# Altium PCB -RasPi-BplusHAT.PcbDoc
Units mm, origin at the board's own origin, x right, y up, seen from the top; angles counter-clockwise.
Board outline 65.02 x 56.01 mm, 2 copper layers (Top, Bottom), stack 1.57 mm thick; 52 components, 51 nets, 172 pads, 0 vias.
Unrouted connection lines stored in the file: 99.
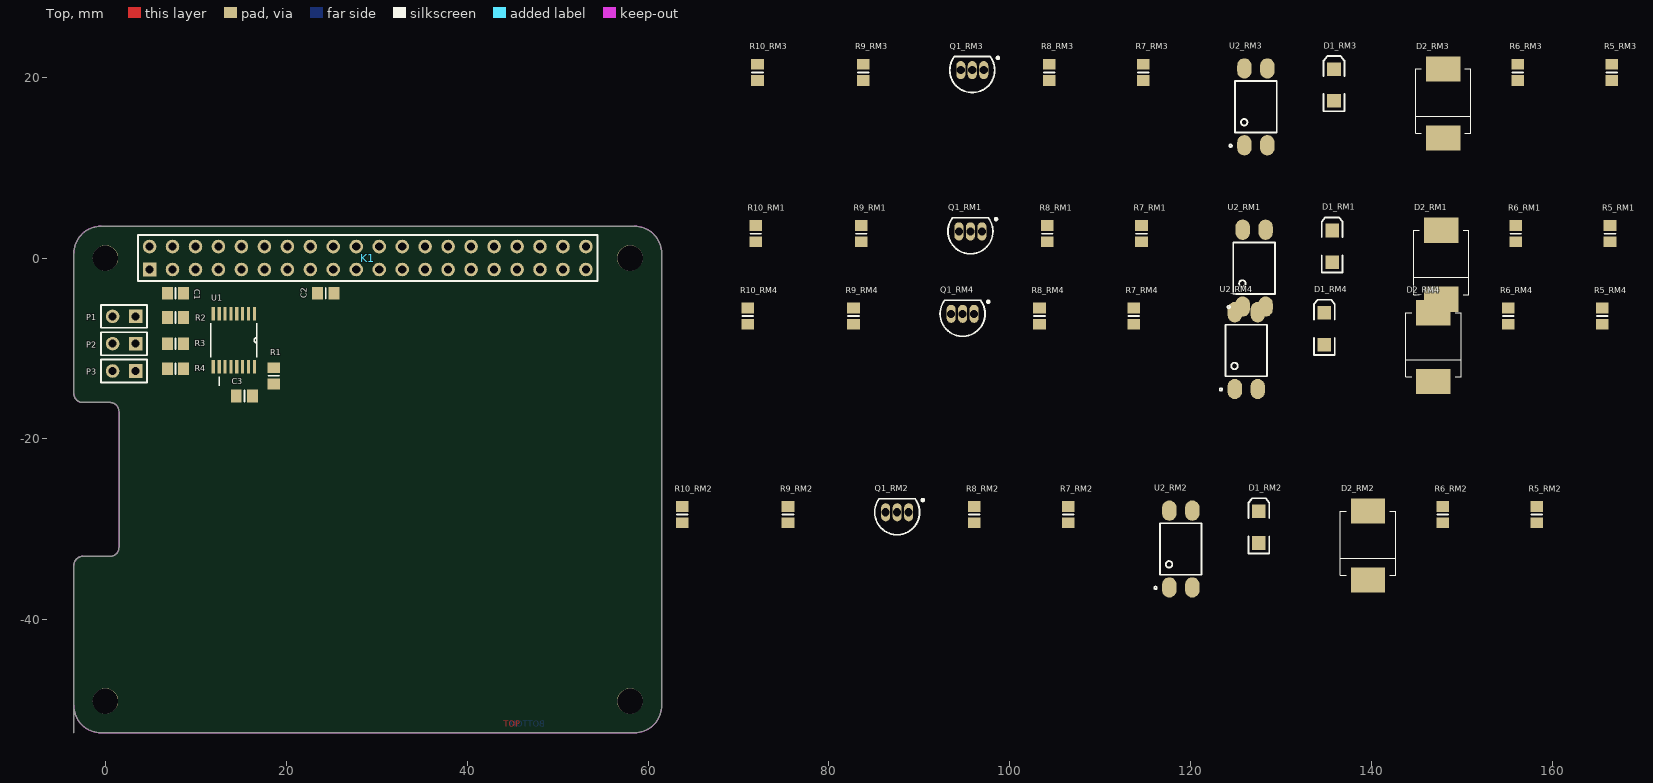
[diagram p0: Top view]
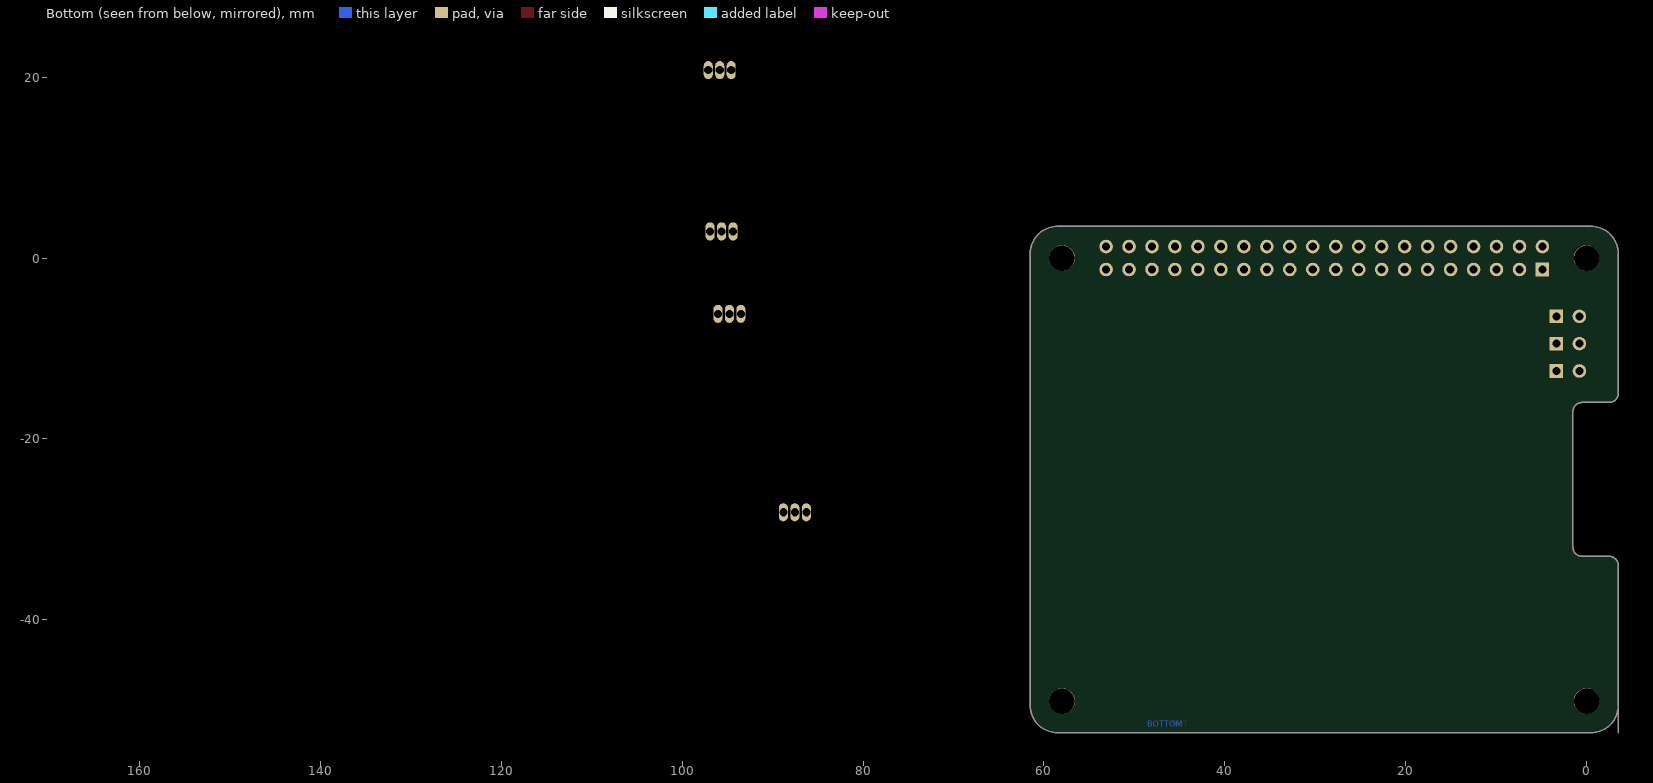
[diagram p1: Bottom view, seen from below]

## Layer stack, top to bottom
Top Solder: solder mask 0.0102, Solder Resist, Dk 3.5
Top: signal copper 0.035
Dielectric 1: core 1.5, FR-4, Dk 4.8
Bottom: signal copper 0.035
Bottom Solder: solder mask 0.0102, Solder Resist, Dk 3.5

## Board outline
-3.505,-49.479 ccw(c-0.483,-49.479) -0.483,-52.502 58.496,-52.502 ccw(c58.496,-49.479) 61.519,-49.479 61.519,0.508 ccw(c58.509,0.495) 58.496,3.505 -0.483,3.505 ccw(c-0.495,0.495) -3.505,0.508 -3.505,-14.986 ccw(c-2.502,-14.973) -2.489,-15.977 0.508,-15.977 cw(c0.495,-16.98) 1.499,-16.993 1.499,-31.979 cw(c0.495,-31.991) 0.508,-32.995 -2.489,-32.995 ccw(c-2.502,-33.998) -3.505,-33.985 -3.505,-52.502

## Design rules (kind name [scope] priority, off if disabled: settings)
Clearance mdViaVia [IsVia vs IsVia] p1: gap=0.152
Clearance mdPadVia [IsPad vs IsVia] p2: gap=0.152
Clearance mdPadPad [IsPad vs IsPad] p3: gap=0.152
Clearance mdWireVia [(InLayerClass('Signal Layers') AND IsTrack) vs IsVia] p4: gap=0.152
Clearance mdWirePad [(InLayerClass('Signal Layers') AND IsTrack) vs IsPad] p5: gap=0.152
Clearance mdWireWire [(InLayerClass('Signal Layers') AND IsTrack) vs (InLayerClass('Signal Layers') AND IsTrack)] p6: gap=0.152
Clearance [All] p7: gap=0.152
HoleSize [All] p1: absolutevalues=TRUE maxlimit=2540 minlimit=0.305 maxpercent=80.000 minpercent=20.000
HoleToHoleClearance [All] p1: gap=0.203 allowstackedmicrovias=TRUE
PolygonConnect ThermalVias [IsVia] p1: connectstyle=Direct reliefconductorwidth=0.254 reliefentries=4 polygonreliefangle="90 Angle" airgapwidth=0.254
PolygonConnect [All] p2: connectstyle=Relief reliefconductorwidth=0.254 reliefentries=4 polygonreliefangle="90 Angle" airgapwidth=0.254
RoomDefinition RasPi-BplusHAT [InComponentClass('RasPi-BplusHAT')] p1: confinementstyle=ConfineIn formatcopy=TRUE lockcomponents=FALSE outline -3.505,-52.603 61.57,-52.603 61.57,3.658 -3.505,3.658
RoomDefinition RM4 [InComponentClass('RM4')] p2: confinementstyle=ConfineIn formatcopy=TRUE lockcomponents=FALSE outline 69.901,-16.078 173.914,-16.078 173.914,-1.6 69.901,-1.6
RoomDefinition RM3 [InComponentClass('RM3')] p3: confinementstyle=ConfineIn formatcopy=TRUE lockcomponents=FALSE outline 70.968,10.871 174.981,10.871 174.981,25.349 70.968,25.349
RoomDefinition RM2 [InComponentClass('RM2')] p4: confinementstyle=ConfineIn formatcopy=TRUE lockcomponents=FALSE outline 62.662,-38.024 166.675,-38.024 166.675,-23.546 62.662,-23.546
RoomDefinition RM1 [InComponentClass('RM1')] p5: confinementstyle=ConfineIn formatcopy=TRUE lockcomponents=FALSE outline 70.764,-6.96 174.777,-6.96 174.777,7.518 70.764,7.518
RoutingVias [All] p1: holewidth=0.711 width=1.27 viastyle="Through Hole" minholewidth=0.711 minwidth=1.27 maxholewidth=0.711 maxwidth=1.27
SilkToSilkClearance [All] p1 off: silktosilkclearance=0.254
SilkToSolderMaskClearance [IsPad] p1 off: minsilkscreentomaskgap=0.254 clearancetoexposedcopper=TRUE
SolderMaskExpansion [All] p1: expansion=0.051
Width [All] p1: maxlimit=2540 minlimit=0.152 preferedwidth=0.254
26 further rules are at their usual default settings.

## Classes and differential pairs
channel class RelayPowerStage: RM1 RM2 RM3 RM4
component class RM4: D1_RM4 D2_RM4 J2_RM4 K2_RM4 Q1_RM4 R5_RM4 R6_RM4 R7_RM4 R8_RM4 R9_RM4 R10_RM4 U2_RM4
component class RM3: D1_RM3 D2_RM3 J2_RM3 K2_RM3 Q1_RM3 R5_RM3 R6_RM3 R7_RM3 R8_RM3 R9_RM3 R10_RM3 U2_RM3
component class RM2: D1_RM2 D2_RM2 J2_RM2 K2_RM2 Q1_RM2 R5_RM2 R6_RM2 R7_RM2 R8_RM2 R9_RM2 R10_RM2 U2_RM2
component class RM1: D1_RM1 D2_RM1 J2_RM1 K2_RM1 Q1_RM1 R5_RM1 R6_RM1 R7_RM1 R8_RM1 R9_RM1 R10_RM1 U2_RM1
component class RasPi-BplusHAT: C1 C2 C3 J1 K1 P1 P2 P3 R1 R2 R3 R4 U1

## Components (designator, comment, footprint, x,y, rotation, side; value= is the part's Value field where it differs from the comment)
C1 "Cap" 6-0805_N 7.747,-3.912 r0 top
C2 "Cap" 6-0805_N 24.359,-3.912 r0 top
C3 "Cap" 6-0805_N 15.367,-15.265 r0 top
D1_RM1 "LED2" 3.2X1.6X1.1 135.661,1.295 r90 top (schematic designator D1)
D1_RM2 "LED2" 3.2X1.6X1.1 127.559,-29.769 r90 top (schematic designator D1)
D1_RM3 "LED2" 3.2X1.6X1.1 135.865,19.126 r90 top (schematic designator D1)
D1_RM4 "LED2" 3.2X1.6X1.1 134.798,-7.823 r90 top (schematic designator D1)
D2_RM1 "S1BB-13-F" DIODE_SMC 147.726,-0.737 r90 top (schematic designator D2)
D2_RM2 "S1BB-13-F" DIODE_SMC 139.624,-31.801 r90 top (schematic designator D2)
D2_RM3 "S1BB-13-F" DIODE_SMC 147.93,17.094 r90 top (schematic designator D2)
D2_RM4 "S1BB-13-F" DIODE_SMC 146.863,-9.855 r90 top (schematic designator D2)
K1 "PIN20X2" HDR2X20 4.877,-1.27 r0 top
P1 "Header 2" HDR1X2 3.327,-6.452 r180 top
P2 "Header 2" HDR1X2 3.327,-9.474 r180 top
P3 "Header 2" HDR1X2 3.327,-12.497 r180 top
Q1_RM1 "P2N2222AG" TO-92A 95.656,2.946 r90 top (schematic designator Q1)
Q1_RM2 "P2N2222AG" TO-92A 87.554,-28.118 r90 top (schematic designator Q1)
Q1_RM3 "P2N2222AG" TO-92A 95.86,20.777 r90 top (schematic designator Q1)
Q1_RM4 "P2N2222AG" TO-92A 94.793,-6.172 r90 top (schematic designator Q1)
R1 "Res1" 6-0805_N 18.618,-13.03 r270 top
R2 "Res1" 6-0805_N 7.747,-6.579 r0 top
R3 "Res1" 6-0805_N 7.747,-9.474 r0 top
R4 "Res1" 6-0805_N 7.747,-12.243 r0 top
R5_RM1 "Res1" 6-0805_N 166.395,2.692 r90 top (schematic designator R5)
R5_RM2 "Res1" 6-0805_N 158.293,-28.372 r90 top (schematic designator R5)
R5_RM3 "Res1" 6-0805_N 166.599,20.523 r90 top (schematic designator R5)
R5_RM4 "Res1" 6-0805_N 165.532,-6.426 r90 top (schematic designator R5)
R6_RM1 "Res1" 6-0805_N 155.981,2.692 r90 top (schematic designator R6)
R6_RM2 "Res1" 6-0805_N 147.879,-28.372 r90 top (schematic designator R6)
R6_RM3 "Res1" 6-0805_N 156.185,20.523 r90 top (schematic designator R6)
R6_RM4 "Res1" 6-0805_N 155.118,-6.426 r90 top (schematic designator R6)
R7_RM1 "Res1" 6-0805_N 114.579,2.692 r90 top (schematic designator R7)
R7_RM2 "Res1" 6-0805_N 106.477,-28.372 r90 top (schematic designator R7)
R7_RM3 "Res1" 6-0805_N 114.783,20.523 r90 top (schematic designator R7)
R7_RM4 "Res1" 6-0805_N 113.716,-6.426 r90 top (schematic designator R7)
R8_RM1 "Res1" 6-0805_N 104.165,2.692 r90 top (schematic designator R8)
R8_RM2 "Res1" 6-0805_N 96.063,-28.372 r90 top (schematic designator R8)
R8_RM3 "Res1" 6-0805_N 104.369,20.523 r90 top (schematic designator R8)
R8_RM4 "Res1" 6-0805_N 103.302,-6.426 r90 top (schematic designator R8)
R9_RM1 "Res1" 6-0805_N 83.591,2.692 r90 top (schematic designator R9)
R9_RM2 "Res1" 6-0805_N 75.489,-28.372 r90 top (schematic designator R9)
R9_RM3 "Res1" 6-0805_N 83.795,20.523 r90 top (schematic designator R9)
R9_RM4 "Res1" 6-0805_N 82.728,-6.426 r90 top (schematic designator R9)
R10_RM1 "Res1" 6-0805_N 71.907,2.692 r90 top (schematic designator R10)
R10_RM2 "Res1" 6-0805_N 63.805,-28.372 r90 top (schematic designator R10)
R10_RM3 "Res1" 6-0805_N 72.111,20.523 r90 top (schematic designator R10)
R10_RM4 "Res1" 6-0805_N 71.044,-6.426 r90 top (schematic designator R10)
U1 "PCA9557PW,112" SOP65P640X110-16N 14.199,-9.093 r270 top
U2_RM1 "PC817X2NIP0F" SOT254P975X400-4N 127.025,-1.118 r90 top (schematic designator U2)
U2_RM2 "PC817X2NIP0F" SOT254P975X400-4N 118.923,-32.182 r90 top (schematic designator U2)
U2_RM3 "PC817X2NIP0F" SOT254P975X400-4N 127.229,16.713 r90 top (schematic designator U2)
U2_RM4 "PC817X2NIP0F" SOT254P975X400-4N 126.162,-10.236 r90 top (schematic designator U2)

## Footprints (in the part's own frame and the unit in brackets; to place one, negate y for a bottom-side part, rotate by r counter-clockwise, add the part's x,y. Pads: shape width x height; smd on the part's side, far side on the other; paste and mask are expansions set on the pad)
3.2X1.6X1.1 [mm] "SMT LED; 2 Flat Leads"
  rect 1.5x1.5 smd: 1(-1.75,0) 2(1.75,0)
  silkscreen extent -2.9,-1.15 3.2,1.15
6-0805_N [mm] "Chip Resistor, Body 2.0x1.2mm, IPC Medium Density"
  rect 1.2x1.4 smd: 1(-0.9,0) 2(0.9,0)
  silkscreen extent 0,-0.6 0,0.6, body extent -1.07,-0.7 1.07,0.7, height 0.7
DIODE_SMC [mil] "Diode; 2 Leads"
  rect 110x150 smd: 1(-150,0) 2(150,0)
  silkscreen extent -130,-120 150,120
HDR1X2 [mm] "Connector; Header; 2 Position"
  rect 1.5x1.5 hole 0.9: 1(0,0)
  round 1.5 hole 0.9: 2(2.54,0)
  silkscreen extent -1.27,-1.27 3.81,1.27
HDR2X20 [mm] "Connector; Header; 20x2 Position"
  rect 1.5x1.5 hole 0.9: 1(0,0)
  round 1.5 hole 0.9: 2(0,2.54) 3(2.54,0) 4(2.54,2.54) 5(5.08,0) 6(5.08,2.54) 7(7.62,0) 8(7.62,2.54) 9(10.16,0) 10(10.16,2.54) 11(12.7,0) 12(12.7,2.54) 13(15.24,0) 14(15.24,2.54) 15(17.78,0) 16(17.78,2.54) 17(20.32,0) 18(20.32,2.54) 19(22.86,0) 20(22.86,2.54) 21(25.4,0) 22(25.4,2.54) 23(27.94,0) 24(27.94,2.54) 25(30.48,0) 26(30.48,2.54) 27(33.02,0) 28(33.02,2.54) 29(35.56,0) 30(35.56,2.54) 31(38.1,0) 32(38.1,2.54) 33(40.64,0) 34(40.64,2.54) 35(43.18,0) 36(43.18,2.54) 37(45.72,0) 38(45.72,2.54) 39(48.26,0) 40(48.26,2.54)
  silkscreen extent -1.27,-1.27 49.53,3.81
SOP65P640X110-16N [mil]
  rect 58x14 smd paste-1000 mask-1000: 1(-115,90) 2(-115,64) 3(-115,38) 4(-115,13) 5(-115,-13) 6(-115,-38) 7(-115,-64) 8(-115,-90) 9(115,-90) 10(115,-64) 11(115,-38) 12(115,-13) 13(115,13) 14(115,38) 15(115,64) 16(115,90)
  silkscreen extent -74,-100 198,100
SOT254P975X400-4N [mm]
  oval 2.25x1.6 smd paste-25.4: 1(-4.25,1.27) 2(-4.25,-1.27) 3(4.25,-1.27) 4(4.25,1.27)
  silkscreen extent -4.44,-2.3 2.85,2.94
TO-92A [mm] "TO, Flat Index; 3 In-Line, Axial Leads; Body Dia. 4.5mm; Leads 0.51 x 0.48 mm (max)"
  oval 2x1 hole 0.9: 1(0,-1.27) 2(0,0) 3(0,1.27)
  silkscreen extent -2.48,-2.96 1.5,2.48, body extent -2.5,-2.5 1.5,2.5, height 6.86

## Part data
C1 C2 C3: "Capacitor"
D1_RM1 D1_RM2 D1_RM3 D1_RM4: "Typical RED, GREEN, YELLOW, AMBER GaAs LED"
D2_RM1 D2_RM2 D2_RM3 D2_RM4: library part "Diode 1N4148", "DIODE GEN PURPOSE 100V 1A SMB"
P1 P2 P3: "Header, 2-Pin"
Q1_RM1 Q1_RM2 Q1_RM3 Q1_RM4: library part 2N3904, "NPN General Purpose Amplifier"
R1 R2 R3 R4 R5_RM1 R5_RM2 R5_RM3 R5_RM4 R6_RM1 R6_RM2 R6_RM3 R6_RM4 R7_RM1 R7_RM2 R7_RM3 R7_RM4 R8_RM1 R8_RM2 R8_RM3 R8_RM4 R9_RM1 R9_RM2 R9_RM3 R9_RM4 R10_RM1 R10_RM2 R10_RM3 R10_RM4: "Resistor"
U1: "PCA9557 Series 8-Bit I2C-Bus and SMBus I/O Port with Reset - TSSOP-16"
U2_RM1 U2_RM2 U2_RM3 U2_RM4: "PC817 Series 1 Channel 80 V 5000 Vrms General Purpose Photocoupler - DIP-4"

## Free pads (board coordinates)
  round 2.819 hole 2.819: 1(0,-48.997) 1(0,0) 1(58.014,-48.997) 1(58.014,0)

## Nets (pads, with @x,y where several pads share a name; then routed paths per layer and width w, separated by ;. In a path a pad name is that pad's centre, name@x,y a point inside that pad or via, vN(x,y) a via of type N, cw(c..) or ccw(c..) an arc to the next point about the centre after c; other vN are vias at no path point)
+3V3: C2.2 C3.2 K1.1 K1.17 R1.1 R2.1 R3.1 R4.1 U1.16
+5V: C1.2 K1.2 K1.4
GND: C1.1 C2.1 C3.1 K1.6 K1.9 K1.14 K1.20 K1.25 K1.30 K1.34 K1.39 P1.1 P2.1 P3.1 R9_RM1.2 R9_RM2.2 R9_RM3.2 R9_RM4.2 U1.8 U2_RM1.2 U2_RM2.2 U2_RM3.2 U2_RM4.2
NetD1_RM1_1: D1_RM1.1 R6_RM1.2
NetD1_RM1_2: D1_RM1.2 D2_RM1.1 Q1_RM1.3
NetD1_RM2_1: D1_RM2.1 R6_RM2.2
NetD1_RM2_2: D1_RM2.2 D2_RM2.1 Q1_RM2.3
NetD1_RM3_1: D1_RM3.1 R6_RM3.2
NetD1_RM3_2: D1_RM3.2 D2_RM3.1 Q1_RM3.3
NetD1_RM4_1: D1_RM4.1 R6_RM4.2
NetD1_RM4_2: D1_RM4.2 D2_RM4.1 Q1_RM4.3
NetD2_RM1_2: D2_RM1.2 R5_RM1.2
NetD2_RM2_2: D2_RM2.2 R5_RM2.2
NetD2_RM3_2: D2_RM3.2 R5_RM3.2
NetD2_RM4_2: D2_RM4.2 R5_RM4.2
NetJ1_1: Q1_RM1.1 Q1_RM2.1 Q1_RM3.1 Q1_RM4.1 R10_RM1.2 R10_RM2.2 R10_RM3.2 R10_RM4.2
NetJ1_2: R5_RM1.1 R5_RM2.1 R5_RM3.1 R5_RM4.1 R6_RM1.1 R6_RM2.1 R6_RM3.1 R6_RM4.1 U2_RM1.4 U2_RM2.4 U2_RM3.4 U2_RM4.4
NetJ2_RM1_1: 
NetJ2_RM1_2: 
NetJ2_RM1_3: 
NetJ2_RM2_1: 
NetJ2_RM2_2: 
NetJ2_RM2_3: 
NetJ2_RM3_1: 
NetJ2_RM3_2: 
NetJ2_RM3_3: 
NetJ2_RM4_1: 
NetJ2_RM4_2: 
NetJ2_RM4_3: 
NetP1_2: P1.2 R2.2 U1.5
NetP2_2: P2.2 R3.2 U1.4
NetP3_2: P3.2 R4.2 U1.3
NetQ1_RM1_2: Q1_RM1.2 R8_RM1.2
NetQ1_RM2_2: Q1_RM2.2 R8_RM2.2
NetQ1_RM3_2: Q1_RM3.2 R8_RM3.2
NetQ1_RM4_2: Q1_RM4.2 R8_RM4.2
NetR1_2: R1.2 U1.15
NetR7_RM1_1: R7_RM1.1 R9_RM1.1 U1.10
NetR7_RM1_2: R7_RM1.2 U2_RM1.1
NetR7_RM2_1: R7_RM2.1 R9_RM2.1 U1.9
NetR7_RM2_2: R7_RM2.2 U2_RM2.1
NetR7_RM3_1: R7_RM3.1 R9_RM3.1 U1.7
NetR7_RM3_2: R7_RM3.2 U2_RM3.1
NetR7_RM4_1: R7_RM4.1 R9_RM4.1 U1.6
NetR7_RM4_2: R7_RM4.2 U2_RM4.1
NetR8_RM1_1: R8_RM1.1 R10_RM1.1 U2_RM1.3
NetR8_RM2_1: R8_RM2.1 R10_RM2.1 U2_RM2.3
NetR8_RM3_1: R8_RM3.1 R10_RM3.1 U2_RM3.3
NetR8_RM4_1: R8_RM4.1 R10_RM4.1 U2_RM4.3
SCL: K1.5 U1.1
SDA: K1.3 U1.2
pads on no net: K1.7 K1.8 K1.10 K1.11 K1.12 K1.13 K1.15 K1.16 K1.18 K1.19 K1.21 K1.22 K1.23 K1.24 K1.26 K1.27 K1.28 K1.29 K1.31 K1.32 K1.33 K1.35 K1.36 K1.37 K1.38 K1.40 U1.11 U1.12 U1.13 U1.14

## Keep-outs
Keep-Out Layer:
  lines w0: -3.505,-49.479 ccw(c-0.483,-49.479) -0.483,-52.502 58.496,-52.502 ccw(c58.496,-49.479) 61.519,-49.479 61.519,0.508 ccw(c58.509,0.495) 58.496,3.505 -0.483,3.505 ccw(c-0.495,0.495) -3.505,0.508 -3.505,-14.986 ccw(c-2.502,-14.973) -2.489,-15.977 0.508,-15.977 cw(c0.495,-16.98) 1.499,-16.993 1.499,-31.979 cw(c0.495,-31.991) 0.508,-32.995 -2.489,-32.995 ccw(c-2.502,-33.998) -3.505,-33.985 -3.505,-49.479

## Other copper
Top:
  text "TOP" at 44.075,-51.865 h0.64
Bottom:
  text "BOTTOM" at 48.568,-51.865 h0.64

## Silkscreen, mask and mechanical layers (free items; w line width, h text height)
Dimension:
  lines w0: -3.505,-49.479 ccw(c-0.483,-49.479) -0.483,-52.502 58.496,-52.502 ccw(c58.496,-49.479) 61.519,-49.479 61.519,0.508 ccw(c58.509,0.495) 58.496,3.505 -0.483,3.505 ccw(c-0.495,0.495) -3.505,0.508 -3.505,-14.986 ccw(c-2.502,-14.973) -2.489,-15.977 0.508,-15.977 cw(c0.495,-16.98) 1.499,-16.993 1.499,-31.979 cw(c0.495,-31.991) 0.508,-32.995 -2.489,-32.995 ccw(c-2.502,-33.998) -3.505,-33.985 -3.505,-49.479
tRestrict:
  circle w3.124: c0,0 r1.575
  circle w3.124: c58.014,0 r1.575
  circle w3.124: c58.014,-48.997 r1.575
  circle w3.124: c0,-48.997 r1.575
bRestrict:
  circle w3.124: c0,-48.997 r1.575
  circle w3.124: c0,0 r1.575
  circle w3.124: c58.014,-48.997 r1.575
  circle w3.124: c58.014,0 r1.575
Unrouted:
  lines w0: 4.877,-1.27 25.197,-1.27 51.714,-17.145 ; 4.877,1.27 7.417,1.27 ; 37.897,-1.27 51.714,-13.335 56.642,-7.925 ; 37.897,1.27 51.714,-14.605 56.642,-10.465 ; 51.714,-15.875 51.562,-19.99 55.982,-22.758 ; 56.591,-19.99 53.442,-19.99 51.714,-17.145 ; 58.522,-7.925 58.522,-10.465 51.714,-17.145